# Altium PCB ASCII-gpbb-pvt1.PcbDoc (part 1 of 2)
Units mm, origin at the board's own origin, x right, y up, seen from the top; angles counter-clockwise.
Board outline 65.1 x 57.9 mm, 2 copper layers (Top Layer, Bottom Layer); 52 components, 106 nets, 1112 pads, 130 vias.
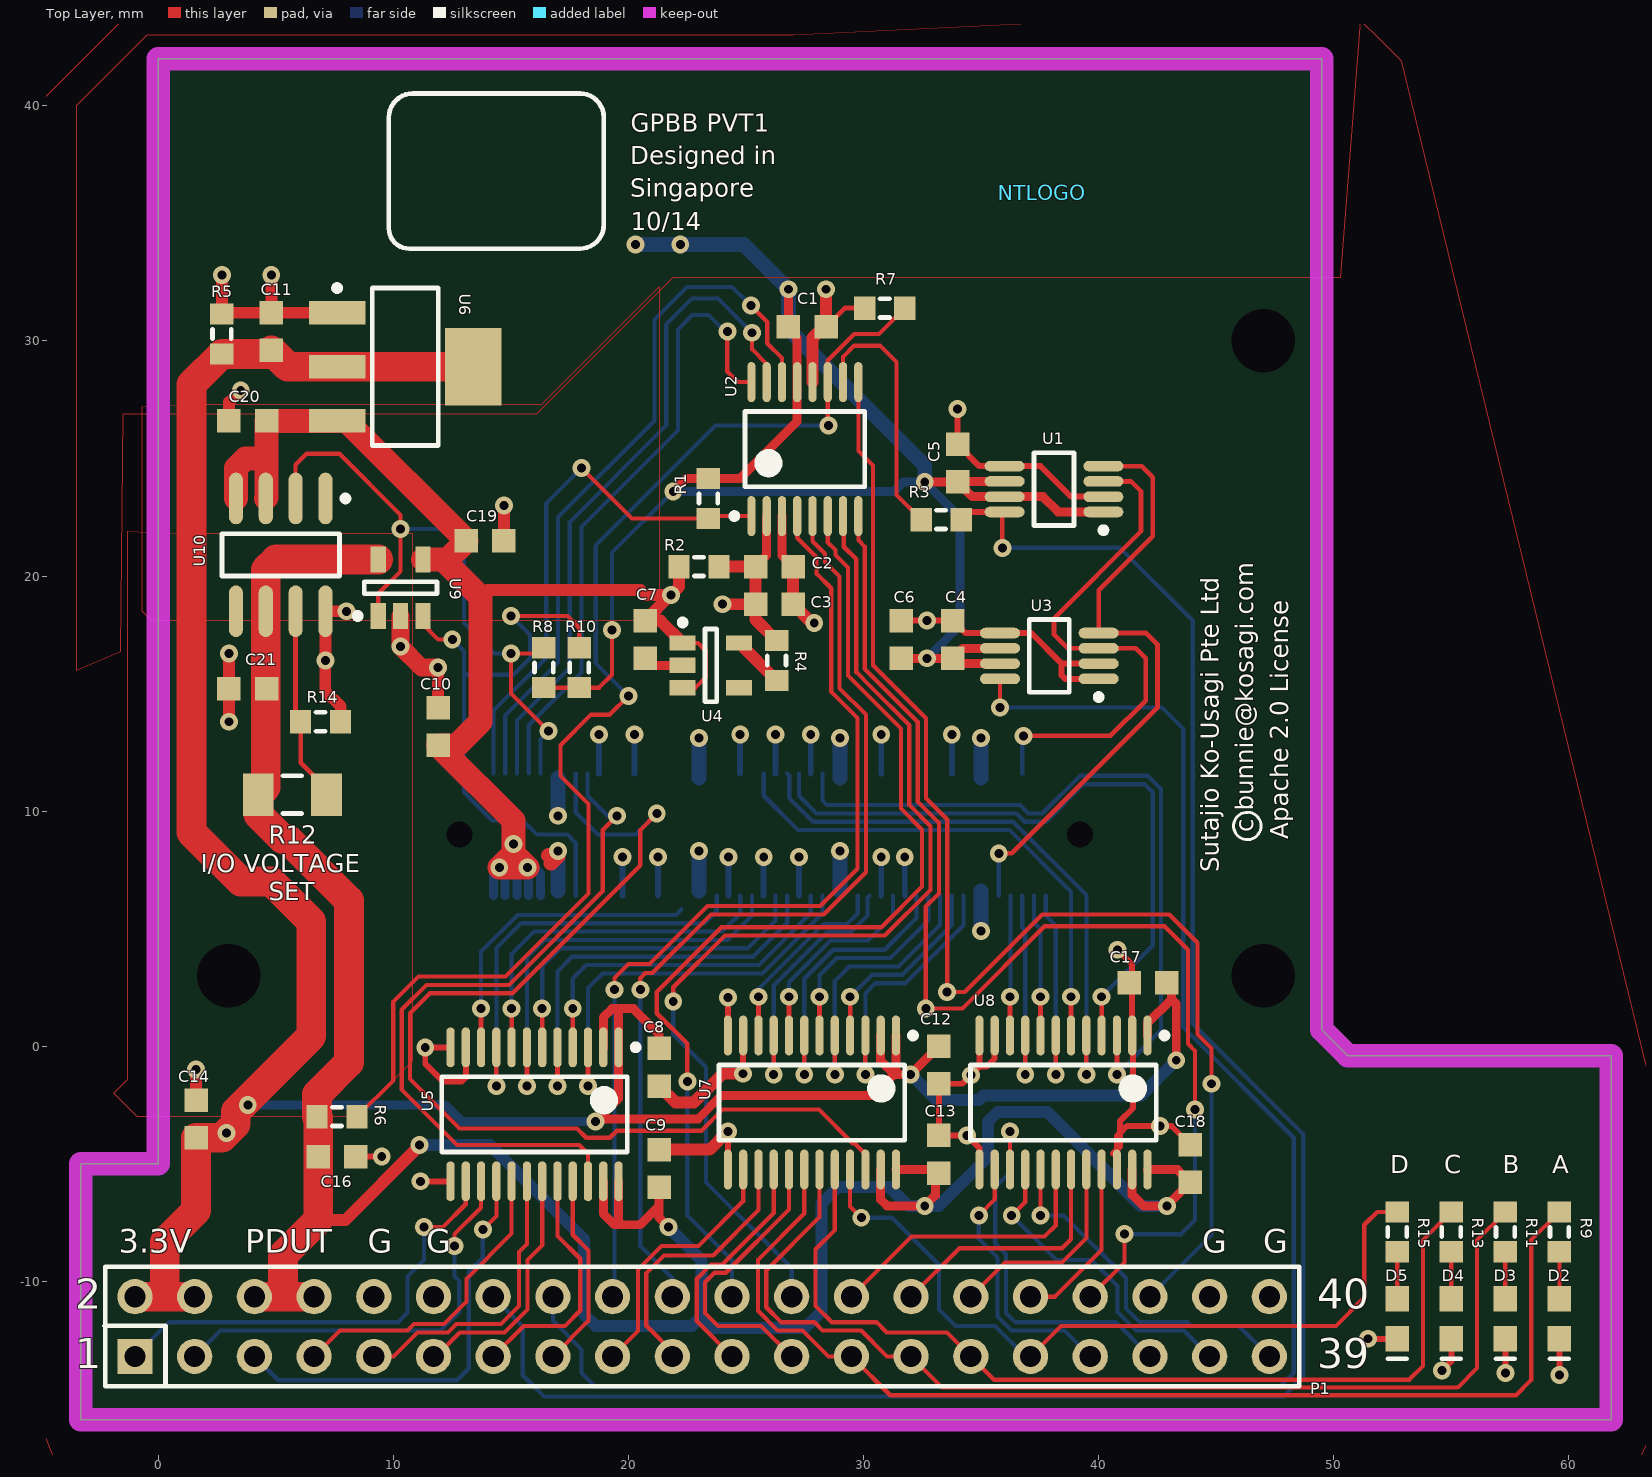
[diagram p0: Top Layer view]
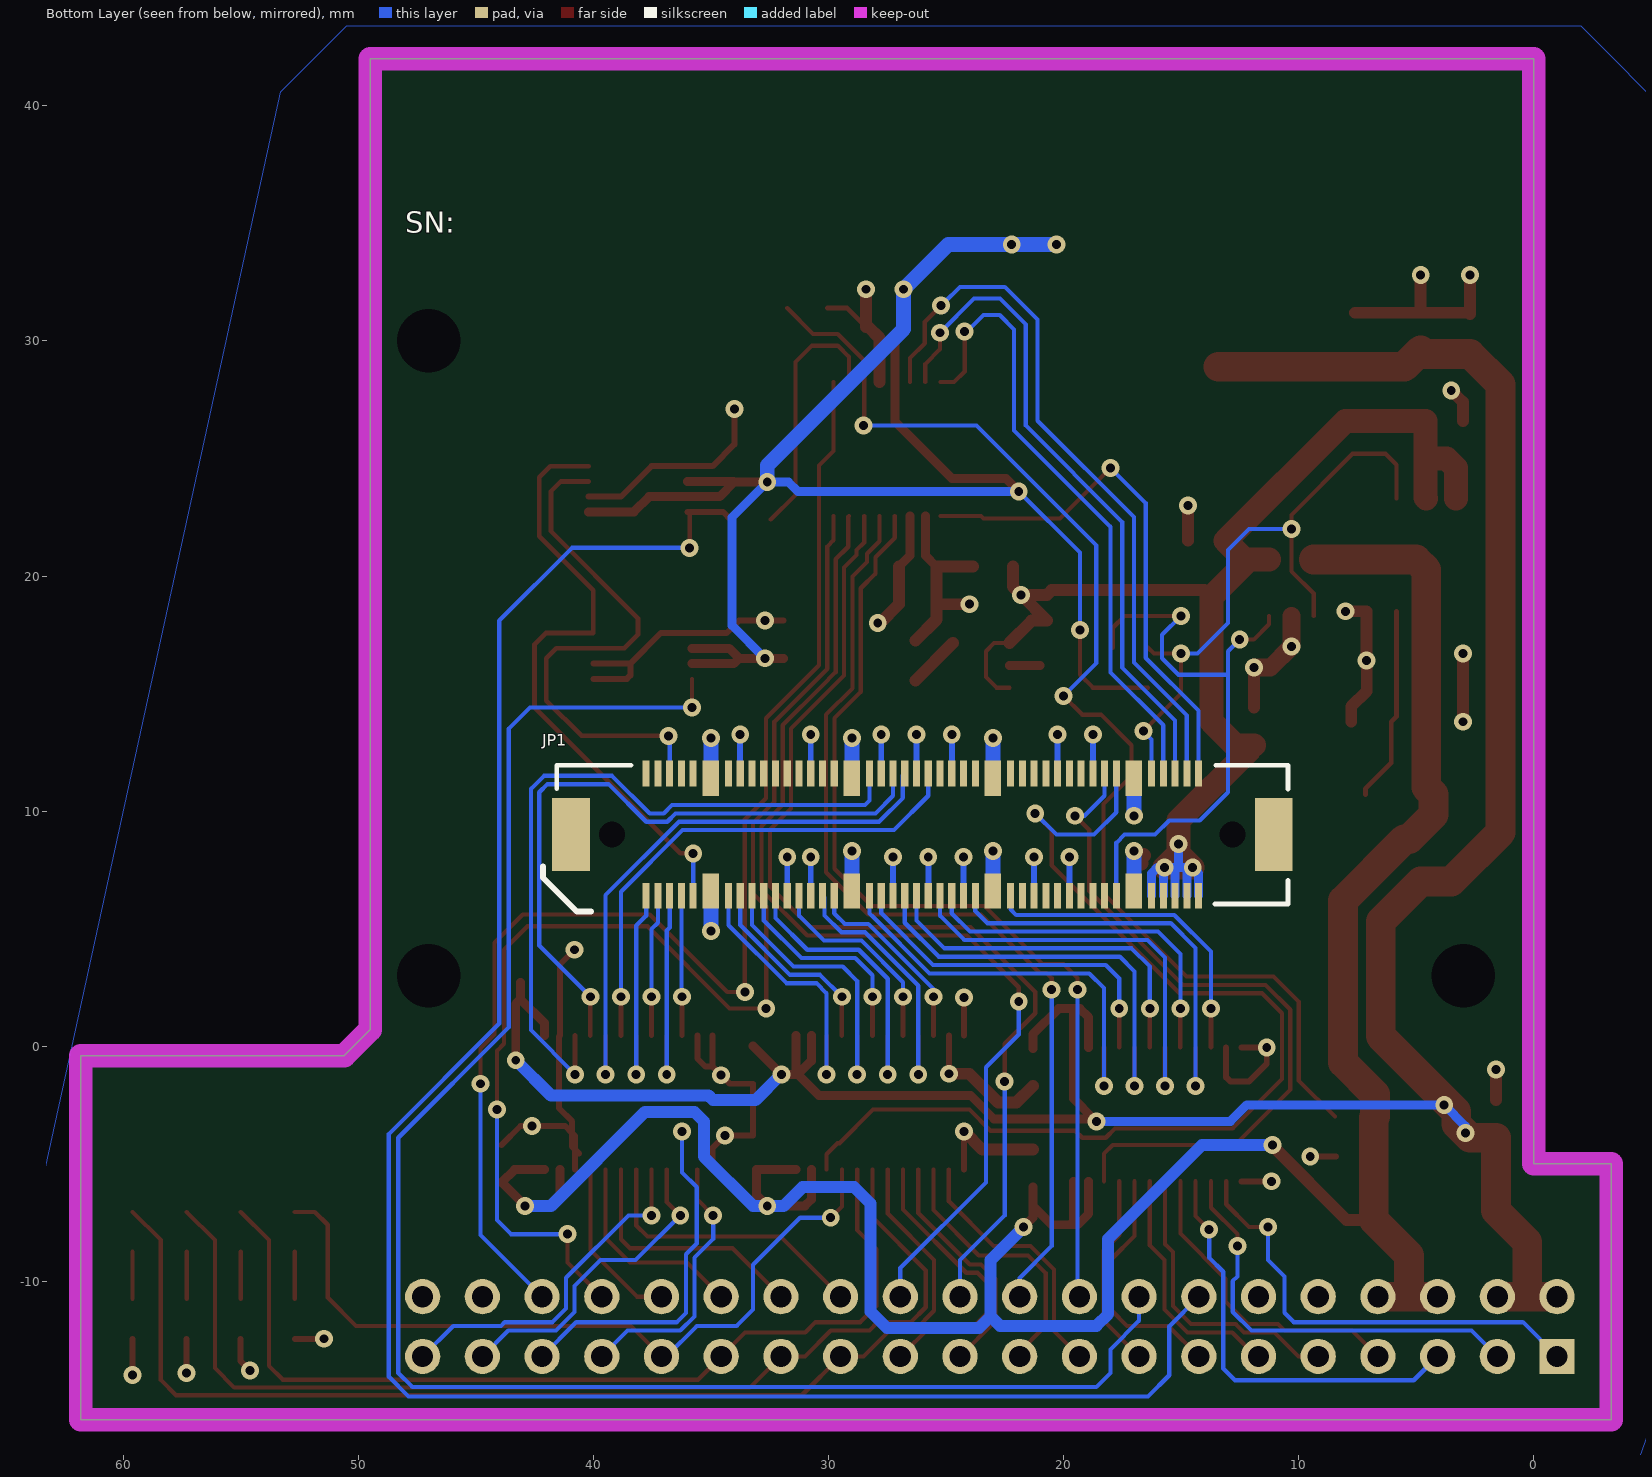
[diagram p1: Bottom Layer view, seen from below]

## Layer stack, top to bottom
Top Solder: solder mask 0.0102, Solder Resist, Dk 3.5
Top Layer: signal copper 0.0356
Dielectric1: dielectric 0.32, FR-4, Dk 4.8
Bottom Layer: signal copper 0.0356
Bottom Solder: solder mask 0.0102, Solder Resist, Dk 3.5

## Board outline
-3.3,-15.9 -3.3,-5 0,-5 0,42 49.5,42 49.5,0.7 50.6,-0.4 61.8,-0.4 61.8,-15.9

## Design rules (kind name [scope] priority, off if disabled: settings)
AssemblyTestPointUsage [All] p0 off: scope1count=1 scope1_0_kind=Board scope1_0_value=Board scope2count=1 scope2_0_kind=Board scope2_0_value=Board commentlength=0
AssemblyTestPointUsage [All] p1 off:
AssemblyTestpoint [All] p0 off: scope1count=1 scope1_0_kind=Board scope1_0_value=Board scope2count=1 scope2_0_kind=Board scope2_0_value=Board commentlength=0
AssemblyTestpoint [All] p1 off: testpointundercomponent=TRUE minsize=1.016 maxsize=2.54 preferedsize=1.524 minholesize=0 maxholesize=1.016 preferedholesize=0.813 testpointgrid=0.025 usegrid=TRUE gridtolerance=0 allowsidetop=TRUE allowsidebottom=TRUE
Clearance NPTH [All] p0 off: scope1count=1 scope1_0_kind=Board scope1_0_value=Board scope2count=1 scope2_0_kind=Board scope2_0_value=Board commentlength=64 gap=0.635 // Protel DXP Scope 1 Expression Was: PadIsPlated = 'False'   NPTH
Clearance [All] p0: scope1count=1 scope1_0_kind=Board scope1_0_value=Board scope2count=1 scope2_0_kind=Board scope2_0_value=Board commentlength=0 gap=0.152
Clearance NPTH [PadIsPlated = 'False'] p1: gap=0.635 // NPTH
Clearance [All] p2: gap=0.152
ComponentClearance [All] p0 off: scope1count=1 scope1_0_kind=Board scope1_0_value=Board scope2count=1 scope2_0_kind=Board scope2_0_value=Board commentlength=0 gap=0.254 collisioncheckmode=3
ComponentClearance [All] p1 off: gap=0.254 collisioncheckmode=3 verticalgap=0.254 showdistances=FALSE
DiffPairsRouting [All] p0: scope1count=1 scope1_0_kind=Board scope1_0_value=Board scope2count=1 scope2_0_kind=Board scope2_0_value=Board commentlength=0
FabricationTestPointUsage [All] p0 off: scope1count=1 scope1_0_kind=Board scope1_0_value=Board scope2count=1 scope2_0_kind=Board scope2_0_value=Board commentlength=0 valid=0 allowmultiple=FALSE
FabricationTestPointUsage [All] p1 off: valid=0 allowmultiple=FALSE
FabricationTestpoint [All] p0 off: scope1count=1 scope1_0_kind=Board scope1_0_value=Board scope2count=1 scope2_0_kind=Board scope2_0_value=Board commentlength=0 side=3 testpointundercomponent=TRUE minsize=1.016 maxsize=2.54 preferedsize=1.524 minholesize=0 maxholesize=1.016 preferedholesize=0.813 testpointgrid=0.025
FabricationTestpoint [All] p1 off: side=3 testpointundercomponent=TRUE minsize=1.016 maxsize=2.54 preferedsize=1.524 minholesize=0 maxholesize=1.016 preferedholesize=0.813 testpointgrid=0.025 allowsidetop=TRUE allowsidebottom=TRUE usegrid=TRUE gridtolerance=0
FanoutControl Fanout_Default [All] p0: scope1count=1 scope1_0_kind=Board scope1_0_value=Board scope2count=1 scope2_0_kind=Board scope2_0_value=Board commentlength=30 // Fanout_Default (Default Rule)
FanoutControl Fanout_Small [All] p0 off: scope1count=1 scope1_0_kind=Board scope1_0_value=Board scope2count=1 scope2_0_kind=Board scope2_0_value=Board commentlength=84 // Protel DXP Scope 1 Expression Was: (CompPinCount < 5)   Fanout_Small (Default Rule)
FanoutControl Fanout_SOIC [All] p0 off: scope1count=1 scope1_0_kind=Board scope1_0_value=Board scope2count=1 scope2_0_kind=Board scope2_0_value=Board commentlength=71 // Protel DXP Scope 1 Expression Was: IsSOIC   Fanout_SOIC (Default Rule)
FanoutControl Fanout_LCC [All] p0 off: scope1count=1 scope1_0_kind=Board scope1_0_value=Board scope2count=1 scope2_0_kind=Board scope2_0_value=Board commentlength=69 // Protel DXP Scope 1 Expression Was: IsLCC   Fanout_LCC (Default Rule)
FanoutControl Fanout_BGA [All] p0 off: scope1count=1 scope1_0_kind=Board scope1_0_value=Board scope2count=1 scope2_0_kind=Board scope2_0_value=Board commentlength=69 // Protel DXP Scope 1 Expression Was: IsBGA   Fanout_BGA (Default Rule)
Height [All] p0 off: scope1count=1 scope1_0_kind=Board scope1_0_value=Board scope2count=1 scope2_0_kind=Board scope2_0_value=Board commentlength=0
Height [All] p1 off: minheight=0 maxheight=25.4 prefheight=12.7
HoleSize [All] p0: scope1count=1 scope1_0_kind=Board scope1_0_value=Board scope2count=1 scope2_0_kind=Board scope2_0_value=Board commentlength=0 absolutevalues=TRUE maxlimit=3 minlimit=0.025 maxpercent=80.000 minpercent=20.000
HoleSize [All] p1: absolutevalues=TRUE maxlimit=3 minlimit=0.025 maxpercent=80.000 minpercent=20.000
HoleToHoleClearance [All] p0: scope1count=1 scope1_0_kind=Board scope1_0_value=Board scope2count=1 scope2_0_kind=Board scope2_0_value=Board commentlength=0
LayerPairs [All] p0: scope1count=1 scope1_0_kind=Board scope1_0_value=Board scope2count=1 scope2_0_kind=Board scope2_0_value=Board commentlength=0 enforce=TRUE
MinimumSolderMaskSliver [All] p0 off: scope1count=1 scope1_0_kind=Board scope1_0_value=Board scope2count=1 scope2_0_kind=Board scope2_0_value=Board commentlength=0
MinimumSolderMaskSliver [All] p1 off: minsoldermaskwidth=0.254
NetAntennae [All] p0 off: scope1count=1 scope1_0_kind=Board scope1_0_value=Board scope2count=1 scope2_0_kind=Board scope2_0_value=Board commentlength=0
NetAntennae [All] p1 off: netantennaetolerance=0
PasteMaskExpansion [All] p0: scope1count=1 scope1_0_kind=Board scope1_0_value=Board scope2count=1 scope2_0_kind=Board scope2_0_value=Board commentlength=0 expansion=0
PlaneClearance [All] p0: scope1count=1 scope1_0_kind=Board scope1_0_value=Board scope2count=1 scope2_0_kind=Board scope2_0_value=Board commentlength=0 clearance=0.508
PlaneConnect [All] p0: scope1count=1 scope1_0_kind=Board scope1_0_value=Board scope2count=1 scope2_0_kind=Board scope2_0_value=Board commentlength=0 planeconnectstyle=Relief reliefexpansion=0.508 reliefentries=4 reliefconductorwidth=0.635 reliefairgap=0.254
PlaneConnect [All] p1: planeconnectstyle=Relief reliefexpansion=0.508 reliefentries=4 reliefconductorwidth=0.635 reliefairgap=0.254
PolygonConnect [All] p0: scope1count=1 scope1_0_kind=Board scope1_0_value=Board scope2count=1 scope2_0_kind=Board scope2_0_value=Board commentlength=0 connectstyle=Relief reliefconductorwidth=0.635 reliefentries=4 polygonreliefangle="90 Angle"
PolygonConnect [All] p1: connectstyle=Relief reliefconductorwidth=0.635 reliefentries=4 polygonreliefangle="90 Angle" airgapwidth=0.254
RoomDefinition analog [All] p0 off: scope1count=1 scope1_0_kind=ComponentClass scope1_0_value=analog scope2count=1 scope2_0_kind=Board scope2_0_value=Board commentlength=0 region_x1=73228200 region_y1=15314930 region_x2=85551010 region_y2=17992090 confinementstyle=ConfineIn
RoomDefinition breakout [All] p0 off: scope1count=1 scope1_0_kind=ComponentClass scope1_0_value=breakout scope2count=1 scope2_0_kind=Board scope2_0_value=Board commentlength=0 region_x1=75400000 region_y1=11400000 region_x2=79000000 region_y2=15400000 confinementstyle=ConfineIn
RoomDefinition analog [InComponentClass('analog')] p1 off: confinementstyle=ConfineIn formatcopy=TRUE lockcomponents=FALSE outline 50.618,-11.392 81.918,-11.392 81.918,-4.592 50.618,-4.592
RoomDefinition breakout [InComponentClass('breakout')] p2 off: confinementstyle=ConfineIn formatcopy=TRUE lockcomponents=FALSE outline 56.134,-21.336 65.278,-21.336 65.278,-11.176 56.134,-11.176
RoutingCorners [All] p0: scope1count=1 scope1_0_kind=Board scope1_0_value=Board scope2count=1 scope2_0_kind=Board scope2_0_value=Board commentlength=0 cornerstyle=45-Degree minsetback=2.54 maxsetback=2.54
RoutingLayers [All] p0: scope1count=1 scope1_0_kind=Board scope1_0_value=Board scope2count=1 scope2_0_kind=Board scope2_0_value=Board commentlength=0 top layer=Automatic bottom layer=Automatic
RoutingPriority [All] p0: scope1count=1 scope1_0_kind=Board scope1_0_value=Board scope2count=1 scope2_0_kind=Board scope2_0_value=Board commentlength=0
RoutingTopology [All] p0: scope1count=1 scope1_0_kind=Board scope1_0_value=Board scope2count=1 scope2_0_kind=Board scope2_0_value=Board commentlength=0 topology=Shortest
RoutingVias [All] p0: scope1count=1 scope1_0_kind=Board scope1_0_value=Board scope2count=1 scope2_0_kind=Board scope2_0_value=Board commentlength=0 holewidth=0.381 width=0.762 viastyle="Through Hole" minholewidth=0.381 minwidth=0.762 maxholewidth=0.381 maxwidth=0.762
RoutingVias [All] p1: holewidth=0.381 width=0.762 viastyle="Through Hole" minholewidth=0.381 minwidth=0.762 maxholewidth=0.381 maxwidth=0.762
ShortCircuit [All] p0: scope1count=1 scope1_0_kind=Board scope1_0_value=Board scope2count=1 scope2_0_kind=Board scope2_0_value=Board commentlength=0 allowed=FALSE
SilkToBoardRegionClearance [All] p0: scope1count=1 scope1_0_kind=Board scope1_0_value=Board scope2count=1 scope2_0_kind=Board scope2_0_value=Board commentlength=0
SilkToSilkClearance [All] p0 off: scope1count=1 scope1_0_kind=Board scope1_0_value=Board scope2count=1 scope2_0_kind=Board scope2_0_value=Board commentlength=0
SilkToSilkClearance [All] p1 off: silktosilkclearance=0.254
SilkToSolderMaskClearance [All] p0 off: scope1count=1 scope1_0_kind=Board scope1_0_value=Board scope2count=1 scope2_0_kind=Board scope2_0_value=Board commentlength=44 // Protel DXP Scope 1 Expression Was: IsPad
SilkToSolderMaskClearance [IsPad] p1 off: minsilkscreentomaskgap=0.254 clearancetoexposedcopper=TRUE
SolderMaskExpansion [All] p0: scope1count=1 scope1_0_kind=Board scope1_0_value=Board scope2count=1 scope2_0_kind=Board scope2_0_value=Board commentlength=0 expansion=0.07
SolderMaskExpansion [All] p1: expansion=0.07
UnRoutedNet [All] p0: scope1count=1 scope1_0_kind=Board scope1_0_value=Board scope2count=1 scope2_0_kind=Board scope2_0_value=Board commentlength=0
Width [All] p0: scope1count=1 scope1_0_kind=Board scope1_0_value=Board scope2count=1 scope2_0_kind=Board scope2_0_value=Board commentlength=0 maxlimit=2.54 minlimit=0.178 preferedwidth=0.254
Width [All] p1: maxlimit=2.54 minlimit=0.178 preferedwidth=0.254 minimp=50.000000 maximp=50.000000 favimp=50.000000
17 further rules are at their usual default settings.

## Classes and differential pairs
component class analog: C1 C2 C3 C4 C5 C6 C7 R1 R2 R3 R4 U1 U2 U3 U4
component class breakout: C8 C9 C10 C11 C12 C13 C14 C16 C17 C18 C19 C20 C21 D2 D3 D4 D5 JP1 NTLOGO P1 R5 R6 R7 R8 R9 R10 R11 R12 R13 R14 R15 U5 U6 U7 U8 U9 U10

## Components (designator, comment, footprint, x,y, rotation, side; value= is the part's Value field where it differs from the comment)
C1 "0.1uF, 25V, X5R, 20%" CAPC1608N 27.6,30.6 r0 top
C2 "0.1uF, 25V, X5R, 20%" CAPC1608N 26.2,20.4 r0 top
C3 "10uF, 10V, X5R, 20%" CAPC1608N 26.2,18.8 r0 top
C4 "0.1uF, 25V, X5R, 20%" CAPC1608N 33.8,17.3 r90 top
C5 "0.1uF, 25V, X5R, 20%" CAPC1608N 34,24.8 r90 top
C6 "10uF, 10V, X5R, 20%" CAPC1608N 31.6,17.3 r90 top
C7 "0.1uF, 25V, X5R, 20%" CAPC1608N 20.7,17.3 r270 top
C8 "0.1uF, 25V, X5R, 20%" CAPC1608N 21.3,-0.9 r270 top
C9 "0.1uF, 25V, X5R, 20%" CAPC1608N 21.3,-5.2 r90 top
C10 "10uF, 10V, X5R, 20%" CAPC1608N 11.9,13.6 r90 top
C11 "10uF, 10V, X5R, 20%" CAPC1608N 4.8,30.4 r90 top
C12 "0.1uF, 25V, X5R, 20%" CAPC1608N 33.2,-0.8 r270 top
C13 "0.1uF, 25V, X5R, 20%" CAPC1608N 33.2,-4.6 r90 top
C14 "10uF, 10V, X5R, 20%" CAPC1608N 1.6,-3.1 r90 top
C16 "10uF, 10V, X5R, 20%" CAPC1608N 7.6,-4.7 r0 top
C17 "0.1uF, 25V, X5R, 20%" CAPC1608N 42.1,2.7 r180 top
C18 "0.1uF, 25V, X5R, 20%" CAPC1608N 43.9,-5 r90 top
C19 "10uF, 10V, X5R, 20%" CAPC1608N 13.9,21.5 r0 top
C20 "10uF, 10V, X5R, 20%" CAPC1608N 3.8,26.6 r180 top
C21 "10uF, 10V, X5R, 20%" CAPC1608N 3.8,15.2 r180 top
D2 "APT1608SGC green" CD1608-0603 59.6,-11.6 r270 top
D3 "APT1608SGC green" CD1608-0603 57.3,-11.6 r270 top
D4 "APT1608SGC green" CD1608-0603 55,-11.6 r270 top
D5 "APT1608SGC green" CD1608-0603 52.7,-11.6 r270 top
JP1 "FX10A-80P/8-SV1(**)" HRS_FX10A-80P/8-SV1(**) 26,9 r180 bottom
NTLOGO "Novena Logo" NOVENA_LOGO 35.1,38.8 r0 top
P1 "Male 20x2 2.54mm-pitch header" HDR2X20 -1,-13.2 r0 top
R1 "10k, 5%" RESC1608N 23.4,23.3 r270 top
R2 "4.7 ohm, 5% (DNP)" RESC1608N 23,20.4 r180 top
R3 "0 ohm" RESC1608N 33.3,22.4 r0 top
R4 "0 ohm" RESC1608N 26.3,16.4 r270 top
R5 "1k, 1%" RESC1608N 2.7,30.3 r90 top
R6 "10k, 1%" RESC1608N 7.6,-3 r180 top
R7 "10k, 1%" RESC1608N 30.9,31.4 r180 top
R8 "10k, 5%" RESC1608N 16.4,16.1 r270 top
R9 "150, 5%" RESC1608N 59.6,-7.9 r90 top
R10 "10k, 5%" RESC1608N 17.9,16.1 r270 top
R11 "150, 5%" RESC1608N 57.3,-7.9 r90 top
R12 "316,1% 1206" RESC3216N 5.7,10.7 r0 top
R13 "150, 5%" RESC1608N 55,-7.9 r90 top
R14 "100, 1%" RESC1608N 6.9,13.8 r180 top
R15 "150, 5%" RESC1608N 52.7,-7.9 r90 top
U1 "DAC101C085CIMM/NOPB" MUA08A_N 38.1,23.7 r180 top
U2 "ADC108S022" SOP65P640-16N 27.5,25.4 r90 top
U3 "DAC101C085CIMM/NOPB" MUA08A_N 37.9,16.6 r180 top
U4 "LP2980IM5-4.7/NOPB" SOT23-5AN 23.5,16.2 r0 top
U5 "SN74LVC8T245PWR" TSOP65P640-24AN 16,-2.9 r270 top
U6 "LM1117MP-3.3" MP04A_N 10.5,28.9 r0 top
U7 "SN74LVC8T245PWR" TSOP65P640-24AN 27.8,-2.4 r270 top
U8 "SN74LVC8T245PWR" TSOP65P640-24AN 38.5,-2.4 r270 top
U9 "RT9706" SOT23-5AN 10.3,19.5 r90 top
U10 "AP2318M-ADJ" SOIC127P600-8N 5.2,20.9 r270 top

## Footprints (in the part's own frame and the unit in brackets; to place one, negate y for a bottom-side part, rotate by r counter-clockwise, add the part's x,y. Pads: shape width x height; smd on the part's side, far side on the other; paste and mask are expansions set on the pad)
CAPC1608N [mm] "Chip Capacitor, Body 1.6x0.8mm, IPC Medium Density"
  rect 1x1 smd: 1(-0.8,0) 2(0.8,0)
CD1608-0603 [mm] "Chip Diode; Body 1.6 x 0.8 mm (LxW typ)"
  rect 1.1x1 smd: 1(-0.85,0) 2(0.85,0)
  silkscreen extent 1.7,-0.4 1.7,0.4
HDR2X20 [mm] "Connector; Header; 20x2 Position"
  rect 1.5x1.5 hole 0.9: 1(0,0)
  round 1.5 hole 0.9: 2(0,2.54) 3(2.54,0) 4(2.54,2.54) 5(5.08,0) 6(5.08,2.54) 7(7.62,0) 8(7.62,2.54) 9(10.16,0) 10(10.16,2.54) 11(12.7,0) 12(12.7,2.54) 13(15.24,0) 14(15.24,2.54) 15(17.78,0) 16(17.78,2.54) 17(20.32,0) 18(20.32,2.54) 19(22.86,0) 20(22.86,2.54) 21(25.4,0) 22(25.4,2.54) 23(27.94,0) 24(27.94,2.54) 25(30.48,0) 26(30.48,2.54) 27(33.02,0) 28(33.02,2.54) 29(35.56,0) 30(35.56,2.54) 31(38.1,0) 32(38.1,2.54) 33(40.64,0) 34(40.64,2.54) 35(43.18,0) 36(43.18,2.54) 37(45.72,0) 38(45.72,2.54) 39(48.26,0) 40(48.26,2.54)
  silkscreen extent -1.27,-1.27 49.53,3.81
HRS_FX10A-80P/8-SV1(**) [mm] "10Gbps 80 pin board to board header, 5mm mating height"
  rect 1.6x3.1 smd: 0(-14.95,0) 0(14.95,0)
  round 0.5 hole 1.1 unplated: 0(-13.2,0) 0(13.2,0)
  rect 0.3x1.1 smd mask-0.025: A1(-11.75,-2.6) A2(-11.25,-2.6) A3(-10.75,-2.6) A4(-10.25,-2.6) A5(-9.75,-2.6) A6(-8.25,-2.6) A7(-7.75,-2.6) A8(-7.25,-2.6) A9(-6.75,-2.6) A10(-6.25,-2.6) A11(-5.75,-2.6) A12(-5.25,-2.6) A13(-4.75,-2.6) A14(-4.25,-2.6) A15(-3.75,-2.6) A16(-2.25,-2.6) A17(-1.75,-2.6) A18(-1.25,-2.6) A19(-0.75,-2.6) A20(-0.25,-2.6) A21(0.25,-2.6) A22(0.75,-2.6) A23(1.25,-2.6) A24(1.75,-2.6) A25(2.25,-2.6) A26(3.75,-2.6) A27(4.25,-2.6) A28(4.75,-2.6) A29(5.25,-2.6) A30(5.75,-2.6) A31(6.25,-2.6) A32(6.75,-2.6) A33(7.25,-2.6) A34(7.75,-2.6) A35(8.25,-2.6) A36(9.75,-2.6) A37(10.25,-2.6) A38(10.75,-2.6) A39(11.25,-2.6) A40(11.75,-2.6) B1(-11.75,2.6) B2(-11.25,2.6) B3(-10.75,2.6) B4(-10.25,2.6) B5(-9.75,2.6) B6(-8.25,2.6) B7(-7.75,2.6) B8(-7.25,2.6) B9(-6.75,2.6) B10(-6.25,2.6) B11(-5.75,2.6) B12(-5.25,2.6) B13(-4.75,2.6) B14(-4.25,2.6) B15(-3.75,2.6) B16(-2.25,2.6) B17(-1.75,2.6) B18(-1.25,2.6) B19(-0.75,2.6) B20(-0.25,2.6) B21(0.25,2.6) B22(0.75,2.6) B23(1.25,2.6) B24(1.75,2.6) B25(2.25,2.6) B26(3.75,2.6) B27(4.25,2.6) B28(4.75,2.6) B29(5.25,2.6) B30(5.75,2.6) B31(6.25,2.6) B32(6.75,2.6) B33(7.25,2.6) B34(7.75,2.6) B35(8.25,2.6) B36(9.75,2.6) B37(10.25,2.6) B38(10.75,2.6) B39(11.25,2.6) B40(11.75,2.6)
  rect 0.7x1.5 smd mask-0.025: GND1(-9,-2.4) GND2(-3,-2.4) GND3(3,-2.4) GND4(9,-2.4) GND5(-9,2.4) GND6(-3,2.4) GND7(3,2.4) GND8(9,2.4)
  silkscreen extent -16.15,-3.27 15.55,2.95
MP04A_N [mm] "SOT223, 4-Leads, Body 6.5x3.5mm, Pitch 2.3mm, Lead Span 7mm, IPC Medium Density"
  rect 2.4x1 smd: 1(-2.9,2.3) 2(-2.9,0) 3(-2.9,-2.3)
  rect 2.4x3.3 smd: 4(2.9,0)
  silkscreen extent -3.02,-3.35 1.4,3.47
MUA08A_N [mm] "TSOP, 8-Leads, Body 3x3mm, Pitch 0.65mm, IPC Medium Density"
  oval 1.7x0.45 smd: 1(-2.1,0.975) 2(-2.1,0.325) 3(-2.1,-0.325) 4(-2.1,-0.975) 5(2.1,-0.975) 6(2.1,-0.325) 7(2.1,0.325) 8(2.1,0.975)
  silkscreen extent -2.22,-1.55 0.85,1.87
NOVENA_LOGO [mm] "novena logo in soldermask"
  round 2 on Top Solder mask+0.07: 0(0,-5) 0(0,-2.5) 0(0,0) 0(2.5,-5) 0(2.5,-2.5) 0(2.5,0) 0(5,-2.5) 0(5,0)
  rrect50% 2x2 on Top Solder mask+0.07: 0(5,-5)
RESC1608N [mm] "Chip Resistor, Body 1.6x0.8mm, IPC Medium Density"
  rect 0.9x1 smd: 1(-0.85,0) 2(0.85,0)
  silkscreen extent -0.2,-0.4 0.2,0.4
RESC3216N [mm] "Chip Resistor, Body 3.2x1.6mm, IPC Medium Density"
  rect 1.3x1.8 smd: 1(-1.45,0) 2(1.45,0)
  silkscreen extent -0.4,-0.8 0.4,0.8
SOIC127P600-8N [mm] "SOIC, 8-Leads, Body 4.9x3.9mm, Pitch 1.27mm, IPC Medium Density"
  oval 2.2x0.6 smd: 1(-2.4,1.905) 2(-2.4,0.635) 3(-2.4,-0.635) 4(-2.4,-1.905) 5(2.4,-1.905) 6(2.4,-0.635) 7(2.4,0.635) 8(2.4,1.905)
  silkscreen extent -2.52,-2.5 0.9,2.88
SOP65P640-16N [mm] "SOP, 16-Leads, Body 5x4.4mm, Pitch 0.65mm, IPC Medium Density"
  oval 1.7x0.35 smd: 1(-2.85,2.275) 2(-2.85,1.625) 3(-2.85,0.975) 4(-2.85,0.325) 5(-2.85,-0.325) 6(-2.85,-0.975) 7(-2.85,-1.625) 8(-2.85,-2.275) 9(2.85,-2.275) 10(2.85,-1.625) 11(2.85,-0.975) 12(2.85,-0.325) 13(2.85,0.325) 14(2.85,0.975) 15(2.85,1.625) 16(2.85,2.275)
  silkscreen extent -2.97,-2.55 1.6,3.12
SOT23-5AN [mm] "SOT23, 5-Leads, Body 2.9x1.6mm, Pitch 0.95mm, Lead Span 2.8mm, IPC Medium Density"
  rect 1.1x0.65 smd mask+0.075: 1(-1.2,0.95) 2(-1.2,0) 3(-1.2,-0.95) 4(1.2,-0.95) 5(1.2,0.95)
  silkscreen extent -1.32,-1.55 0.25,1.95
TSOP65P640-24AN [mm] "TSOP, 24-Leads, Body 7.8x4.4mm, Pitch 0.65mm, IPC Medium Density"
  oval 1.7x0.35 smd: 1(-2.85,3.575) 2(-2.85,2.925) 3(-2.85,2.275) 4(-2.85,1.625) 5(-2.85,0.975) 6(-2.85,0.325) 7(-2.85,-0.325) 8(-2.85,-0.975) 9(-2.85,-1.625) 10(-2.85,-2.275) 11(-2.85,-2.925) 12(-2.85,-3.575) 13(2.85,-3.575) 14(2.85,-2.925) 15(2.85,-2.275) 16(2.85,-1.625) 17(2.85,-0.975) 18(2.85,-0.325) 19(2.85,0.325) 20(2.85,0.975) 21(2.85,1.625) 22(2.85,2.275) 23(2.85,2.925) 24(2.85,3.575)
  silkscreen extent -2.97,-3.95 1.6,4.43

## Part data
C1 C2 C3 C4 C5 C6 C7 C8 C9 C10 C11 C12 C13 C14 C16 C17 C18 C19 C20 C21: library part "Cap Semi", "Capacitor (Semiconductor SIM Model)"
D2 D3 D4 D5: library part LED2, "Typical RED, GREEN, YELLOW, AMBER GaAs LED"
JP1: library part HEADER_HRS_FX10A_80, "80-pin 10Gbps 5mm mated height board-to-board connector"
NTLOGO: library part NOTE, "Placeholder for non-electrical BOM items"
P1: library part "Header 20X2", "Header, 20-Pin, Dual row"
R1 R2 R3 R4 R5 R6 R7 R8 R9 R10 R11 R12 R13 R14 R15: library part Res1, "Resistor"
U1 U3: "10-Bit Micro Power Digital-to-Analog Converter with an I2C-Compatible Interface and External Reference, 8 pin MINI SOIC"
U2: library part ADCxx8Sxx2, "12-input SPI ADC, bits & sample rate pin compatible across family"
U4: library part LP2980M5, "50 mA SOT-23 regulator"
U5 U7 U8: "8-bit dual-supply transceiver"
U6: "800mA Low-Dropout Linear Regulator"
U9: "IC LIN SW W/FLAG 500MA 2.0-5.5V SOT23-5"
U10: "600mA UDLO regulator with enable"

## Free pads (board coordinates)
  round 2 hole 2.7 unplated mask+1.5: 0(47,3) 1(3,3) 2(47,30)
  rect 2.54x0.051 on Top Overlay: 1(2.877,36.508) 1(2.877,36.558) 1(2.877,36.609) 1(2.877,36.66) 1(2.877,36.711) 1(2.877,36.762) 1(2.877,36.812) 1(2.877,36.863) 1(2.877,36.914) 1(2.877,36.965) 1(2.877,37.016) 1(2.877,37.066) 1(2.978,37.27) 1(7.296,37.27) 1(7.398,36.457) 1(7.398,36.508) 1(7.398,36.558) 1(7.398,36.609) 1(7.398,36.66) 1(7.398,36.863) 1(7.398,36.914) 1(7.398,36.965) 1(7.398,37.016) 1(7.398,37.066)
  rect 2.591x0.051 on Top Overlay: 1(2.902,36.355) 1(2.902,36.406) 1(2.902,36.457) 1(2.902,37.117) 1(2.902,37.168) 1(2.953,36.304) 1(7.322,36.304) 1(7.373,36.355) 1(7.373,36.406) 1(7.373,37.117) 1(7.373,37.168) 1(7.373,37.219) 1(16.483,36.035) 1(16.483,36.086)
  rect 2.642x0.051 on Top Overlay: 1(2.928,37.219)
  rect 0.102x0.051 on Top Overlay: 1(2.978,39.556) 1(4.045,34.323) 1(6.23,34.323) 1(7.296,39.556) 1(10.514,38.626) 1(10.717,39.795) 1(11.377,37.102) 1(11.631,39.845) 1(12.596,39.033) 1(14.527,36.442) 1(14.781,38.779) 1(14.781,38.829) 1(15.238,35.731) 1(15.644,40.049) 1(15.898,39.744) 1(16.203,39.642) 1(16.61,39.642) 1(17.473,38.474) 1(17.575,35.019)
  rect 0.152x0.051 on Top Overlay: 1(3.004,34.018) 1(7.271,34.018) 1(10.895,39.591) 1(11.911,38.728) 1(12.165,38.169) 1(12.622,39.083) 1(12.673,39.134) 1(12.723,39.185) 1(12.774,39.236) 1(12.825,37.051) 1(12.876,39.337) 1(13.028,39.541) 1(13.13,40.049) 1(13.79,35.477) 1(13.79,39.845) 1(14.959,38.525) 1(15.162,39.642) 1(15.822,38.22) 1(15.873,39.795) 1(16.076,39.49) 1(16.127,39.541) 1(16.127,39.947) 1(16.178,39.591) 1(17.143,35.731) 1(17.549,35.832) 1(17.549,38.728) 1(17.549,38.779) 1(17.549,38.829) 1(17.549,38.88) 1(17.549,38.931) 1(17.549,38.982) 1(17.549,39.033) 1(17.549,39.083) 1(17.549,39.134) 1(17.549,39.185) 1(17.549,39.236) 1(17.549,39.287) 1(17.549,39.642) 1(17.549,39.693) 1(17.549,39.744) 1(17.549,39.795) 1(17.549,39.845) 1(17.549,39.896) 1(17.6,37.102) 1(18.057,35.121) 1(18.057,35.172) 1(18.057,35.223) 1(18.057,35.273) 1(18.057,35.324) 1(18.057,35.375) 1(18.057,35.426) 1(18.057,35.477) 1(18.057,35.527)
  rect 0.254x0.051 on Top Overlay: 1(3.004,34.069) 1(3.004,39.505) 1(4.02,34.374) 1(6.255,34.374) 1(7.271,34.069) 1(7.271,39.505) 1(10.488,35.477) 1(10.539,35.527) 1(10.59,35.578) 1(10.59,38.677) 1(10.641,35.629) 1(10.641,38.728) 1(10.691,35.68) 1(10.742,35.731) 1(10.742,38.779) 1(10.793,35.781) 1(10.844,38.829) 1(10.895,35.934) 1(10.895,38.88) 1(10.945,35.985) 1(10.996,38.931) 1(11.047,38.982) 1(11.098,39.033) 1(11.149,39.083) 1(11.199,39.134) 1(11.352,39.287) 1(11.403,39.337) 1(11.453,37.001) 1(11.453,39.388) 1(11.504,39.49) 1(11.555,39.134) 1(11.555,39.541) 1(11.606,39.642) 1(11.707,39.033) 1(11.758,38.982) 1(11.809,38.931) 1(11.86,38.829) 1(11.86,38.88) 1(12.063,34.461) 1(12.215,38.118) 1(12.774,38.525) 1(12.876,38.575) 1(12.927,36.95) 1(12.927,38.626) 1(12.977,36.899) 1(13.028,36.848) 1(13.028,38.677) 1(13.079,38.728) 1(13.13,38.779) 1(13.181,39.998) 1(13.231,39.896) 1(13.231,39.947) 1(13.689,39.49) 1(13.79,35.578) 1(13.79,39.693) 1(14.552,36.493) 1(14.603,36.543) 1(14.654,34.41) 1(14.654,39.49) 1(14.857,39.337) 1(14.908,39.287) 1(14.908,39.896) 1(14.959,38.575) 1(15.06,39.795) 1(15.111,39.744) 1(15.314,35.781) 1(15.517,38.982) 1(15.568,39.033) 1(15.67,39.083) 1(15.721,39.134) 1(15.771,39.185) 1(15.771,39.947) 1(15.822,39.236) 1(15.822,39.896) 1(16.33,35.985) 1(16.381,36.239) 1(16.381,36.289) 1(16.381,36.34) 1(16.381,36.391) 1(16.381,36.442) 1(16.381,36.493) 1(16.381,36.543) 1(16.584,37.102) 1(16.635,37.204) 1(16.635,38.677) 1(16.686,37.255) 1(16.787,38.779) 1(16.838,38.829) 1(17.194,35.68) 1(17.245,38.728) 1(17.448,40.049) 1(17.549,39.947) 1(17.6,35.121) 1(18.057,34.918) 1(18.057,34.969) 1(18.057,35.019)
  rect 0.356x0.051 on Top Overlay: 1(3.004,39.454) 1(3.969,34.425) 1(6.306,34.425) 1(7.271,34.12) 1(7.271,39.454) 1(11.149,36.289) 1(11.25,36.442) 1(11.301,36.543) 1(11.352,36.645) 1(11.352,39.236) 1(11.453,36.95) 1(12.063,34.511) 1(12.215,34.867) 1(12.266,37.915) 1(12.266,38.067) 1(13.231,36.645) 1(13.231,39.337) 1(13.282,36.594) 1(13.79,35.68) 1(14.705,39.439) 1(14.806,36.696) 1(14.857,36.747) 1(14.959,39.845) 1(15.213,37.051) 1(15.263,37.153) 1(15.314,37.204) 1(15.365,37.255) 1(15.416,37.305) 1(15.416,37.356) 1(15.467,37.407) 1(15.517,37.458) 1(15.517,37.509) 1(15.568,37.559) 1(15.67,37.712) 1(15.873,35.019) 1(15.873,38.118) 1(15.924,35.07) 1(15.975,35.121) 1(15.975,35.172) 1(16.025,35.223) 1(16.076,35.273) 1(16.127,35.375) 1(16.178,35.477) 1(16.737,34.867) 1(16.787,37.407) 1(16.838,37.458) 1(17.245,35.629) 1(17.295,35.578) 1(17.448,38.626) 1(17.448,39.388) 1(17.499,39.998) 1(17.549,35.273) 1(18.057,34.867)
  rect 0.406x0.051 on Top Overlay: 1(3.029,34.12) 1(10.92,39.642) 1(11.326,36.594) 1(11.377,36.696) 1(11.428,36.747) 1(11.58,39.795) 1(11.631,34.867) 1(12.088,34.562) 1(12.292,37.966) 1(13.206,39.693) 1(13.308,36.543) 1(13.358,36.493) 1(13.409,36.442) 1(13.46,36.391) 1(13.46,39.033) 1(13.46,39.236) 1(13.511,36.289) 1(13.511,39.083) 1(13.765,35.731) 1(13.765,35.781) 1(13.765,35.832) 1(14.984,38.626) 1(15.594,34.816) 1(15.695,34.867) 1(15.695,37.763) 1(15.746,34.918) 1(15.746,37.813) 1(15.797,34.969) 1(15.797,37.864) 1(15.898,38.067) 1(16.762,34.816) 1(16.813,34.765) 1(16.914,37.712) 1(17.372,35.527) 1(17.422,35.477) 1(17.422,38.677) 1(17.422,39.337) 1(17.473,35.426) 1(17.524,35.324) 1(17.524,35.375) 1(18.083,34.816)
  rect 0.508x0.051 on Top Overlay: 1(3.029,34.171) 1(3.029,39.403) 1(7.246,34.171) 1(11.377,39.185) 1(11.479,36.797) 1(11.479,36.848) 1(13.054,39.388) 1(13.409,39.287) 1(14.882,34.511) 1(14.984,38.677) 1(15.035,34.562) 1(15.187,34.613) 1(15.898,38.017) 1(16.965,37.559) 1(18.083,34.765)
  rect 0.61x0.051 on Top Overlay: 1(3.029,39.352) 1(7.246,34.222) 1(7.246,39.352) 1(12.038,34.664) 1(13.663,39.795) 1(15.035,38.728) 1(16.914,39.49)
  rect 0.66x0.051 on Top Overlay: 1(3.055,34.222)
  rect 0.762x0.051 on Top Overlay: 1(3.055,34.272) 1(3.055,39.302) 1(7.22,34.272) 1(11.098,39.693) 1(12.012,34.715)
  rect 0.864x0.051 on Top Overlay: 1(3.055,34.323) 1(3.055,39.251) 1(5.137,40.318) 1(7.22,34.323) 1(7.22,39.251)
  rect 0.965x0.051 on Top Overlay: 1(3.055,39.2) 1(5.137,40.165) 1(5.137,40.216) 1(5.137,40.267) 1(7.22,39.2) 1(11.911,34.816)
  rect 1.016x0.051 on Top Overlay: 1(3.08,34.374) 1(5.163,40.114) 1(7.195,34.374)
  rect 1.118x0.051 on Top Overlay: 1(3.08,34.425) 1(3.08,39.149) 1(5.163,39.81) 1(7.195,34.425) 1(7.195,39.149) 1(11.225,39.744)
  rect 2.337x0.051 on Top Overlay: 1(3.08,36.254) 1(6.433,37.778) 1(7.195,36.254)
  rect 1.219x0.051 on Top Overlay: 1(3.08,39.098) 1(5.163,39.556) 1(7.195,39.098)
  rect 2.286x0.051 on Top Overlay: 1(3.156,37.32) 1(3.867,37.778) 1(7.169,37.32)
  rect 2.134x0.051 on Top Overlay: 1(3.232,36.203) 1(3.74,37.727) 1(6.534,37.727) 1(7.042,36.203)
  rect 1.829x0.051 on Top Overlay: 1(3.283,34.577) 1(3.385,34.831) 1(3.436,34.882) 1(3.436,34.933) 1(3.436,37.422) 1(3.486,34.984) 1(3.486,36.05) 1(3.486,36.101) 1(3.486,37.473) 1(3.537,37.524) 1(3.69,35.492) 1(3.69,35.542) 1(6.585,35.492) 1(6.585,35.542) 1(6.788,36.05) 1(6.788,37.473) 1(6.839,34.933) 1(6.839,36.101) 1(6.839,37.422) 1(6.89,34.831) 1(6.992,34.577)
  rect 1.93x0.051 on Top Overlay: 1(3.283,34.628) 1(3.537,36) 1(3.588,35.949) 1(3.588,37.625) 1(3.69,35.644) 1(3.69,35.695) 1(6.585,35.644) 1(6.585,35.695) 1(6.687,35.949) 1(6.687,37.625) 1(6.992,34.628)
  rect 2.032x0.051 on Top Overlay: 1(3.283,37.371) 1(3.69,35.746) 1(3.69,35.796) 1(3.69,35.847) 1(6.585,35.746) 1(6.585,35.796) 1(6.636,35.847) 1(6.992,37.371)
  rect 1.778x0.051 on Top Overlay: 1(3.309,34.526) 1(3.512,35.034) 1(3.512,35.085) 1(3.563,35.136) 1(3.613,35.238) 1(6.661,35.238) 1(6.712,35.136) 1(6.763,35.034) 1(6.763,35.085) 1(6.814,34.984) 1(6.966,34.526) 1(16.33,37.61) 1(17.448,39.541)
  rect 1.88x0.051 on Top Overlay: 1(3.309,34.679) 1(3.359,34.73) 1(3.359,34.78) 1(3.41,36.152) 1(3.563,37.574) 1(3.715,35.593) 1(6.611,35.593) 1(6.712,37.574) 1(6.763,36) 1(6.763,37.524) 1(6.865,34.882) 1(6.865,36.152) 1(6.915,34.78) 1(6.966,34.679) 1(6.966,34.73)
  rect 1.727x0.051 on Top Overlay: 1(3.334,34.476) 1(3.588,35.187) 1(3.639,35.288) 1(3.69,35.339) 1(3.69,35.39) 1(3.69,35.441) 1(5.163,39.251) 1(6.585,35.39) 1(6.585,35.441) 1(6.636,35.288) 1(6.687,35.187) 1(16.305,37.661) 1(17.473,34.715)
  rect 1.981x0.051 on Top Overlay: 1(3.613,35.898) 1(3.664,37.676) 1(5.137,39.2) 1(6.611,37.676) 1(6.661,35.898)
  rect 4.826x0.051 on Top Overlay: 1(5.137,37.828) 1(5.137,37.879) 1(5.137,38.336)
  rect 4.724x0.051 on Top Overlay: 1(5.137,37.93) 1(5.137,37.981) 1(5.137,38.286)
  rect 4.623x0.051 on Top Overlay: 1(5.137,38.032) 1(5.137,38.082) 1(5.137,38.133) 1(5.137,38.184)
  rect 4.928x0.051 on Top Overlay: 1(5.137,38.438)
  rect 5.029x0.051 on Top Overlay: 1(5.137,38.489)
  rect 5.131x0.051 on Top Overlay: 1(5.137,38.59)
  rect 5.232x0.051 on Top Overlay: 1(5.137,38.641)
  rect 5.334x0.051 on Top Overlay: 1(5.137,38.692) 1(5.137,38.743)
  rect 5.436x0.051 on Top Overlay: 1(5.137,38.794) 1(5.137,39.048)
  rect 5.537x0.051 on Top Overlay: 1(5.137,38.844) 1(5.137,38.895) 1(5.137,38.997)
  rect 5.639x0.051 on Top Overlay: 1(5.137,38.946)
  rect 2.489x0.051 on Top Overlay: 1(5.137,39.098) 1(7.423,36.711) 1(7.423,36.762) 1(7.423,36.812)
  rect 2.184x0.051 on Top Overlay: 1(5.137,39.149)
  rect 1.473x0.051 on Top Overlay: 1(5.137,39.302) 1(17.448,34.562)
  rect 1.27x0.051 on Top Overlay: 1(5.137,39.352) 1(5.137,39.403) 1(5.137,39.454) 1(5.137,39.505) 1(17.651,39.591)
  rect 1.168x0.051 on Top Overlay: 1(5.137,39.606) 1(5.137,39.657) 1(5.137,39.708) 1(5.137,39.759)
  rect 1.067x0.051 on Top Overlay: 1(5.137,39.86) 1(5.137,39.911) 1(5.137,39.962) 1(5.137,40.013) 1(5.137,40.064)
  rect 4.674x0.051 on Top Overlay: 1(5.163,38.235)
  rect 4.877x0.051 on Top Overlay: 1(5.163,38.387)
  rect 5.08x0.051 on Top Overlay: 1(5.163,38.54)
  rect 1.676x0.051 on Top Overlay: 1(6.611,35.339) 1(6.966,34.476) 1(17.448,34.664)
  rect 0.711x0.051 on Top Overlay: 1(7.246,39.302)
  rect 0.457x0.051 on Top Overlay: 1(7.271,39.403) 1(11.504,36.899) 1(12.317,38.017) 1(13.485,36.34) 1(13.536,36.239) 1(13.587,36.188) 1(13.638,36.086) 1(13.638,36.137) 1(13.689,35.985) 1(13.689,36.035) 1(13.739,35.883) 1(13.739,35.934) 1(14.755,34.461) 1(15.213,37.001) 1(15.314,34.664) 1(15.416,34.715) 1(15.517,34.765) 1(15.822,37.915) 1(15.873,37.966) 1(16.889,37.509)
  rect 0.203x0.051 on Top Overlay: 1(10.463,35.426) 1(11.428,37.051) 1(11.479,39.439) 1(11.58,39.591) 1(11.885,38.779) 1(12.038,34.41) 1(12.698,38.474) 1(12.85,37.001) 1(12.85,39.287) 1(12.952,39.439) 1(13.003,39.49) 1(13.054,39.591) 1(13.104,39.642) 1(13.155,39.795) 1(13.206,38.829) 1(13.206,39.845) 1(13.257,38.88) 1(13.308,38.931) 1(13.358,38.982) 1(13.612,39.337) 1(13.612,39.388) 1(13.663,39.439) 1(13.714,39.541) 1(13.765,35.527) 1(13.765,39.591) 1(13.765,39.642) 1(14.933,39.236) 1(15.136,39.693) 1(15.695,39.998) 1(15.848,38.169) 1(15.848,39.845) 1(15.898,39.287) 1(15.949,39.337) 1(15.949,40.15) 1(16,39.388) 1(16.051,39.439) 1(16.051,40.049) 1(16.102,39.998) 1(16.508,37.001) 1(16.559,37.051) 1(16.559,38.626) 1(16.61,37.153) 1(16.66,39.591) 1(16.711,38.728) 1(16.762,39.439) 1(16.914,37.813) 1(16.914,38.88) 1(16.965,38.931) 1(17.016,38.982) 1(17.067,39.033) 1(17.118,39.083) 1(17.168,38.779) 1(17.168,39.134) 1(17.219,39.185) 1(17.27,39.236) 1(17.321,39.287) 1(17.473,38.525) 1(17.575,35.07) 1(17.626,37.051) 1(18.032,35.07)
  rect 0.305x0.051 on Top Overlay: 1(10.818,35.832) 1(10.869,35.883) 1(10.971,36.035) 1(11.022,36.086) 1(11.072,36.137) 1(11.072,36.188) 1(11.123,36.239) 1(11.174,36.34) 1(11.225,36.391) 1(11.276,36.493) 1(11.631,39.083) 1(11.682,39.693) 1(12.241,34.918) 1(12.241,34.969) 1(12.241,35.019) 1(12.241,35.07) 1(12.241,35.121) 1(12.241,35.172) 1(12.241,35.223) 1(12.241,35.273) 1(12.241,35.324) 1(12.241,35.375) 1(12.241,35.426) 1(12.241,35.477) 1(12.241,35.527) 1(12.241,35.578) 1(12.241,35.629) 1(12.241,35.68) 1(12.241,35.731) 1(12.241,35.781) 1(12.241,35.832) 1(12.241,35.883) 1(12.241,35.934) 1(12.241,35.985) 1(12.241,36.035) 1(12.241,36.086) 1(12.241,36.137) 1(12.241,36.188) 1(12.241,36.239) 1(12.241,36.289) 1(12.241,36.34) 1(12.241,36.391) 1(12.241,36.442) 1(12.241,36.493) 1(12.241,36.543) 1(12.241,36.594) 1(12.241,36.645) 1(12.241,36.696) 1(12.241,36.747) 1(12.241,36.797) 1(12.241,36.848) 1(12.241,36.899) 1(12.241,36.95) 1(12.241,37.001) 1(12.241,37.051) 1(12.241,37.102) 1(12.241,37.153) 1(12.241,37.204) 1(12.241,37.255) 1(12.241,37.305) 1(12.241,37.356) 1(12.241,37.407) 1(12.241,37.458) 1(12.241,37.509) 1(12.241,37.559) 1(12.241,37.61) 1(12.241,37.661) 1(12.241,37.712) 1(12.241,37.763) 1(12.241,37.813) 1(12.241,37.864) 1(13.054,36.797) 1(13.104,36.747) 1(13.155,36.696) 1(13.511,39.134) 1(13.511,39.185) 1(13.765,35.629) 1(14.679,36.594) 1(14.73,36.645) 1(14.832,39.388) 1(14.933,36.797) 1(15.238,37.102) 1(15.238,38.779) 1(15.289,38.829) 1(15.34,35.832) 1(15.34,35.883) 1(15.34,35.934) 1(15.34,35.985) 1(15.34,36.137) 1(15.34,36.188) 1(15.34,36.239) 1(15.34,36.289) 1(15.34,36.34) 1(15.34,36.391) 1(15.34,36.442) 1(15.34,36.493) 1(15.34,36.543) 1(15.34,36.594) 1(15.34,36.645) 1(15.34,36.696) 1(15.34,36.747) 1(15.34,36.797) 1(15.39,38.88) 1(15.441,38.931) 1(16,40.099) 1(16.102,35.324) 1(16.152,35.426) 1(16.203,35.527) 1(16.203,35.578) 1(16.254,35.629) 1(16.254,35.68) 1(16.254,35.731) 1(16.305,35.781) 1(16.305,35.832) 1(16.305,35.883) 1(16.305,35.934) 1(16.356,36.137) 1(16.356,36.188) 1(16.406,36.594) 1(16.406,36.645) 1(16.406,36.696) 1(16.406,36.747) 1(16.406,36.797) 1(16.711,34.918) 1(16.711,34.969) 1(16.711,35.019) 1(16.711,35.07) 1(16.711,35.121) 1(16.711,35.172) 1(16.711,35.223) 1(16.711,35.273) 1(16.711,35.324) 1(16.711,35.375) 1(16.711,35.426) 1(16.711,35.477) 1(16.711,35.527) 1(16.711,35.578) 1(16.711,35.629) 1(16.711,35.68) 1(16.711,35.731) 1(16.711,35.781) 1(16.711,35.832) 1(16.711,35.883) 1(16.711,35.934) 1(16.711,35.985) 1(16.711,37.305) 1(16.762,37.356) 1(16.914,37.763) 1(17.473,38.575) 1(17.473,39.439) 1(17.473,39.49) 1(17.575,35.172) 1(17.575,35.223) 1(17.626,35.883) 1(17.626,35.934) 1(17.626,35.985) 1(17.626,36.137) 1(17.626,36.188) 1(17.626,36.239) 1(17.626,36.289) 1(17.626,36.34) 1(17.626,36.391) 1(17.626,36.442) 1(17.626,36.493) 1(17.626,36.543) 1(17.626,36.594) 1(17.626,36.645) 1(17.626,36.696) 1(17.626,36.747) 1(17.626,36.797) 1(17.626,37.001) 1(18.083,39.642)
  rect 0.914x0.051 on Top Overlay: 1(11.936,34.765) 1(13.511,39.744)
  rect 0.559x0.051 on Top Overlay: 1(12.063,34.613)
  rect 0.051x0.051 on Top Overlay: 1(12.673,38.423) 1(12.825,37.102) 1(16.127,39.896) 1(16.533,38.575) 1(16.889,37.864) 1(17.143,38.829)
  rect 2.997x0.051 on Top Overlay: 1(16.33,36.848) 1(16.381,36.899)
  rect 2.946x0.051 on Top Overlay: 1(16.406,36.95)
  rect 1.372x0.051 on Top Overlay: 1(17.448,34.511)
  rect 1.626x0.051 on Top Overlay: 1(17.473,34.613)

## Via types
v1: diameter 0.762, hole 0.381, Top Layer to Bottom Layer, tented top, 102 vias
v2: diameter 0.762, hole 0.381, Top Layer to Bottom Layer, tented bottom, 28 vias